# EAGLE board untitled3 (EAGLE 9.6.1)
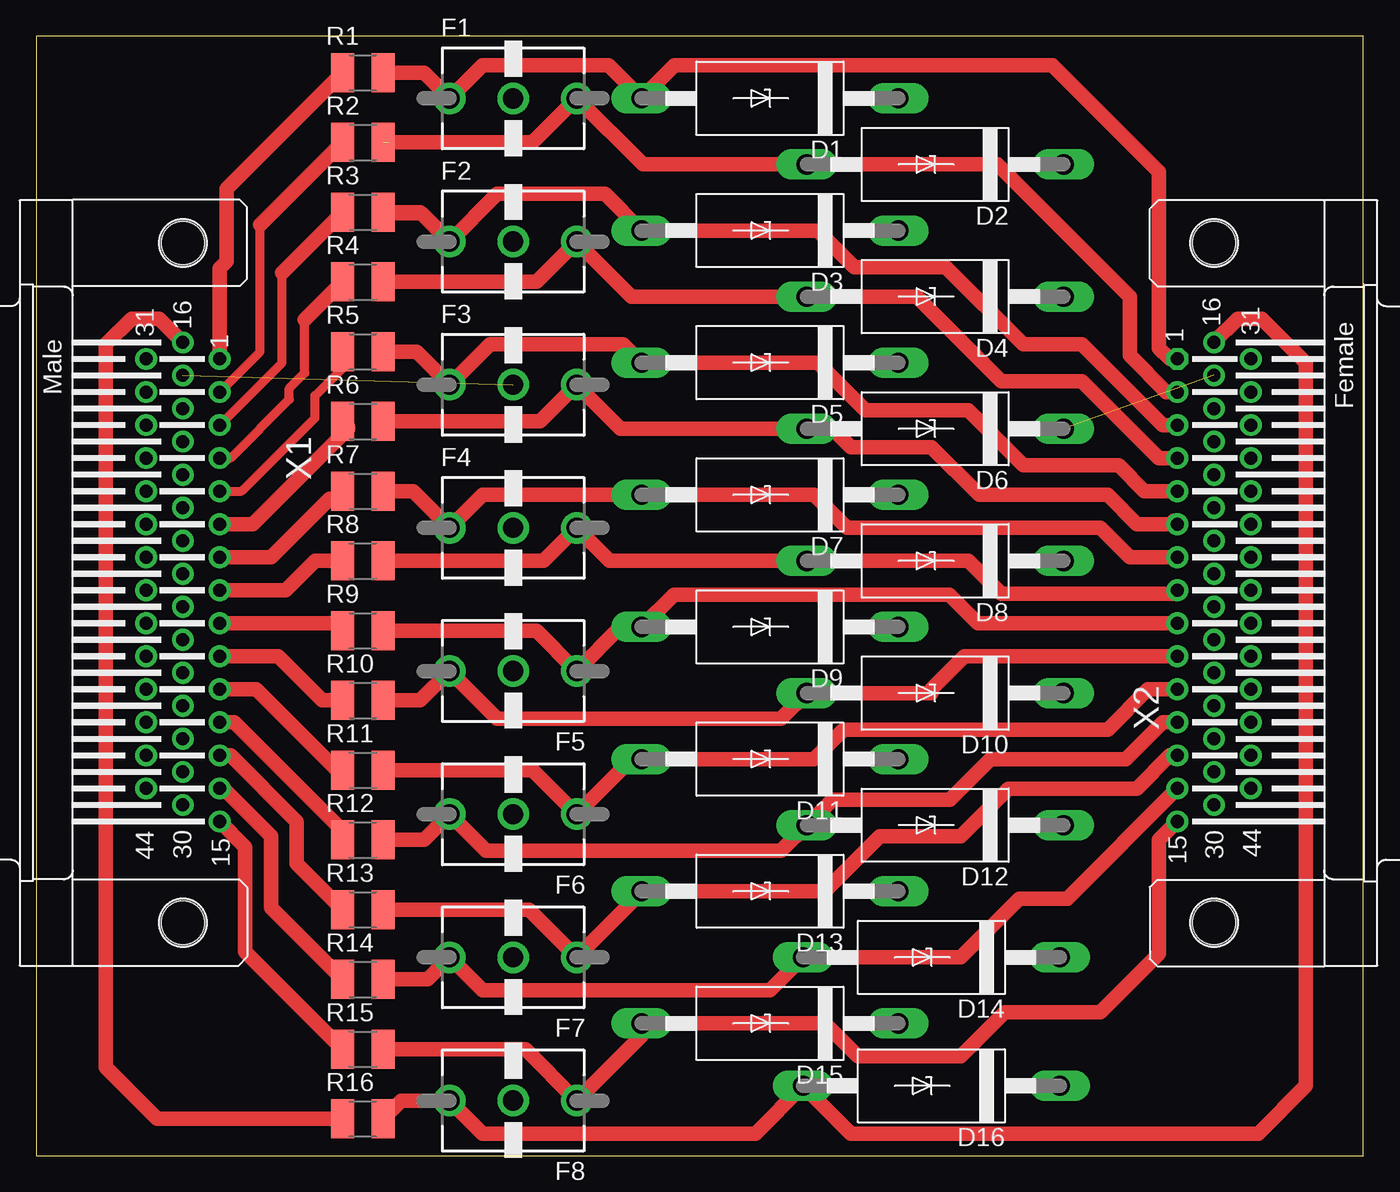
[diagram p0: board, top side]
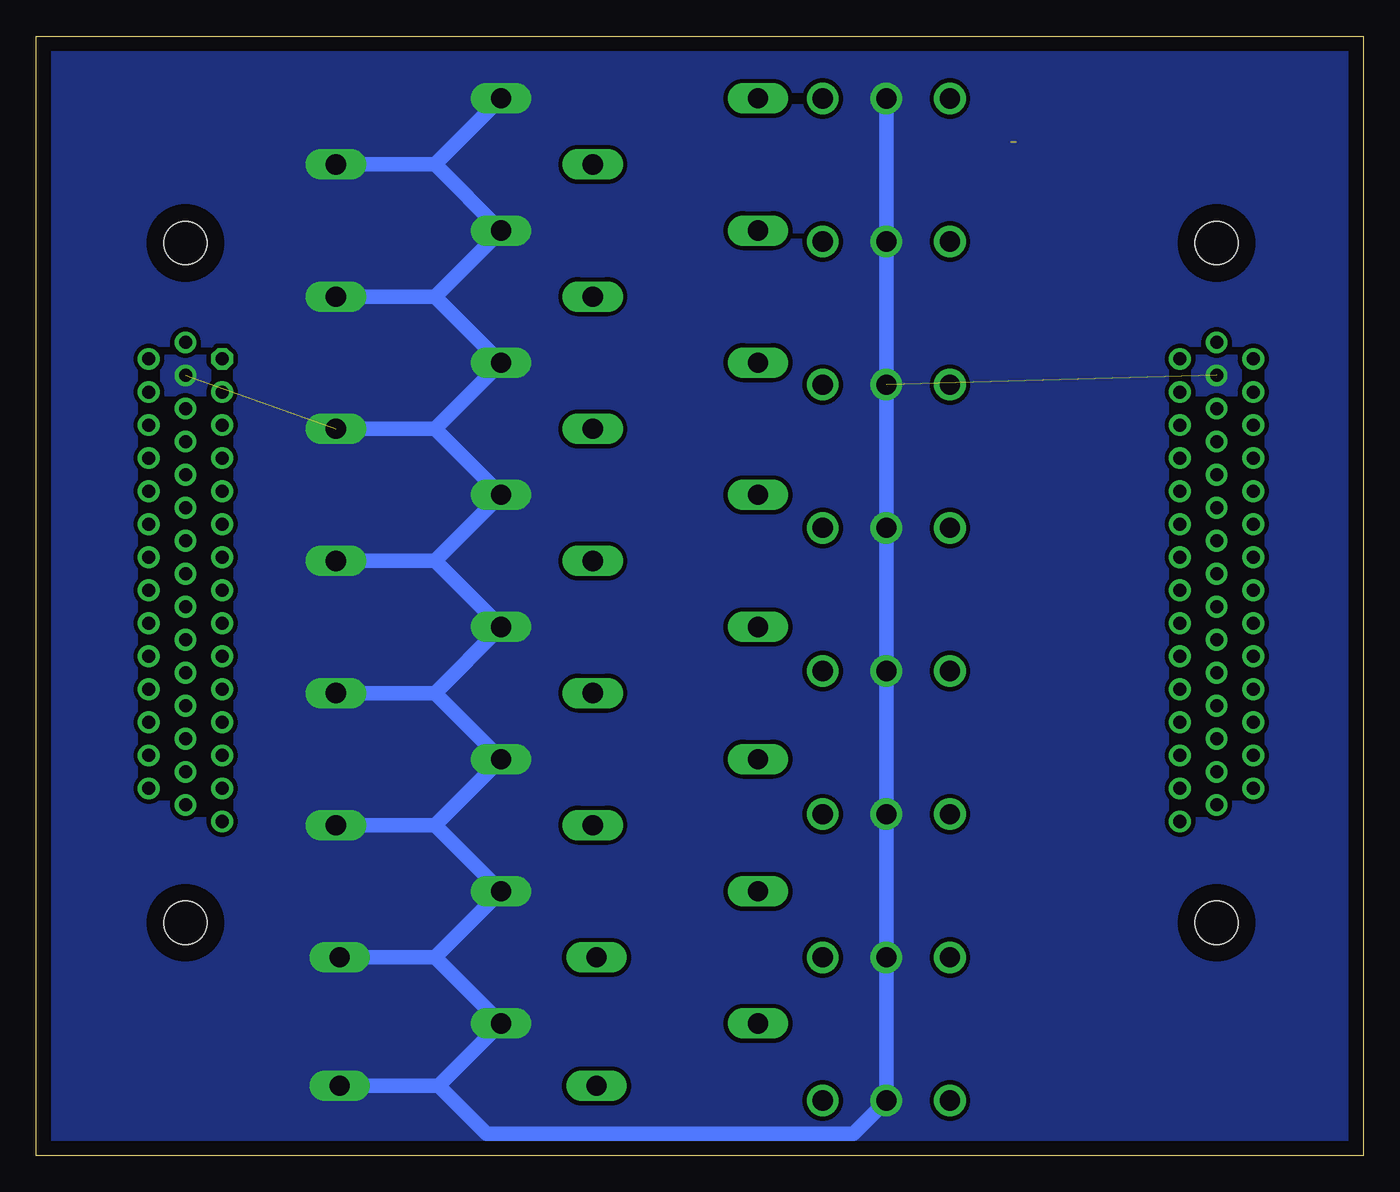
[diagram p1: board, bottom side, seen from below]

Size 91.87 x 77.46 mm. Coordinates in mm from the lower left corner, seen from the top.
Outline: 0,0 91.87,0 91.87,77.46 0,77.46 0,0
Copper layers (1*16): Top 0.035mm / dielectric 1.5mm / Bottom 0.035mm
Design rules "default": minimum track width 15mil, minimum drill 32mil, track to track 12mil, track to pad 12mil, pad to pad 12mil, via to via 12mil, smd to smd 6mil, copper to edge 40mil, drill to drill 40mil, minimum pad ring 12mil, minimum via ring 12mil, stop-mask expansion 4mil, vias tented up to drill 0mil, thermal gap 10mil

## Footprints (pad centres in the part's own frame; a part is rotated, then mirrored left to right if it is on the bottom)
CB429-17 = drill 1.397 long: A 8.89,0; C -8.89,0
T23-A230X = drill 1.4 pad 2.184: 1 -4.4,0; 2 0,0; 3 4.4,0
R1210 = smd 1.6 x 2.7: 1 -1.4,0; 2 1.4,0
HDM44H = drill 0.9: 1 -15.497,2.54; 2 -13.211,2.54; 3 -10.925,2.54; 4 -8.639,2.54; 5 -6.353,2.54; 6 -4.067,2.54; 7 -1.781,2.54; 8 0.505,2.54; 9 2.791,2.54; 10 5.077,2.54; 11 7.363,2.54; 12 9.649,2.54; 13 11.935,2.54; 14 14.221,2.54; 15 16.507,2.54; 16 -16.64,0; 17 -14.354,0; 18 -12.068,0; 19 -9.782,0; 20 -7.496,0; 21 -5.21,0; 22 -2.924,0; 23 -0.638,0; 24 1.648,0; 25 3.934,0; 26 6.22,0; 27 8.506,0; 28 10.792,0; 29 13.078,0; 30 15.364,0; 31 -15.497,-2.54; 32 -13.211,-2.54; 33 -10.925,-2.54; 34 -8.639,-2.54; 35 -6.353,-2.54; 36 -4.067,-2.54; 37 -1.781,-2.54; 38 0.505,-2.54; 39 2.791,-2.54; 40 5.077,-2.54; 41 7.363,-2.54; 42 9.649,-2.54; 43 11.935,-2.54; 44 14.221,-2.54 | hole 3: -23.52,0; 23.52,0
HDF44H = drill 0.9 octagon: 1 15.497,2.54 | drill 0.9: 2 13.211,2.54; 3 10.925,2.54; 4 8.639,2.54; 5 6.353,2.54; 6 4.067,2.54; 7 1.781,2.54; 8 -0.505,2.54; 9 -2.791,2.54; 10 -5.077,2.54; 11 -7.363,2.54; 12 -9.649,2.54; 13 -11.935,2.54; 14 -14.221,2.54; 15 -16.507,2.54; 16 16.64,0; 17 14.354,0; 18 12.068,0; 19 9.782,0; 20 7.496,0; 21 5.21,0; 22 2.924,0; 23 0.638,0; 24 -1.648,0; 25 -3.934,0; 26 -6.22,0; 27 -8.506,0; 28 -10.792,0; 29 -13.078,0; 30 -15.364,0; 31 15.497,-2.54; 32 13.211,-2.54; 33 10.925,-2.54; 34 8.639,-2.54; 35 6.353,-2.54; 36 4.067,-2.54; 37 1.781,-2.54; 38 -0.505,-2.54; 39 -2.791,-2.54; 40 -5.077,-2.54; 41 -7.363,-2.54; 42 -9.649,-2.54; 43 -11.935,-2.54; 44 -14.221,-2.54 | hole 3: -23.52,0; 23.52,0

## Placement (x,y rotation side)
D1  15KEXX  [CB429-17]  50.8,73.15 180 top
D2  15KEXX  [CB429-17]  62.23,68.58 180 top
D3  15KEXX  [CB429-17]  50.8,64.01 180 top
D4  15KEXX  [CB429-17]  62.23,59.44 180 top
D5  15KEXX  [CB429-17]  50.8,54.86 180 top
D6  15KEXX  [CB429-17]  62.23,50.29 180 top
D7  15KEXX  [CB429-17]  50.8,45.72 180 top
D8  15KEXX  [CB429-17]  62.23,41.15 180 top
D9  15KEXX  [CB429-17]  50.8,36.58 180 top
D10  15KEXX  [CB429-17]  62.23,32 180 top
D11  15KEXX  [CB429-17]  50.8,27.43 180 top
D12  15KEXX  [CB429-17]  62.23,22.86 180 top
D13  15KEXX  [CB429-17]  50.8,18.29 180 top
D14  15KEXX  [CB429-17]  61.98,13.72 180 top
D15  15KEXX  [CB429-17]  50.8,9.14 180 top
D16  15KEXX  [CB429-17]  61.98,4.83 180 top
F1  T23-A230X  [T23-A230X]  33.02,73.15 0 top
F2  T23-A230X  [T23-A230X]  33.02,63.25 0 top
F3  T23-A230X  [T23-A230X]  33.02,53.34 0 top
F4  T23-A230X  [T23-A230X]  33.02,43.43 0 top
F5  T23-A230X  [T23-A230X]  33.02,33.53 180 top
F6  T23-A230X  [T23-A230X]  33.02,23.62 180 top
F7  T23-A230X  [T23-A230X]  33.02,13.72 180 top
F8  T23-A230X  [T23-A230X]  33.02,3.81 180 top
R1  [R1210]  22.61,74.93 0 top
R2  [R1210]  22.61,70.1 0 top
R3  [R1210]  22.61,65.28 0 top
R4  [R1210]  22.61,60.45 0 top
R5  [R1210]  22.61,55.63 0 top
R6  [R1210]  22.61,50.8 0 top
R7  [R1210]  22.61,45.97 0 top
R8  [R1210]  22.61,41.15 0 top
R9  [R1210]  22.61,36.32 0 top
R10  [R1210]  22.61,31.5 0 top
R11  [R1210]  22.61,26.67 0 top
R12  [R1210]  22.61,21.84 0 top
R13  [R1210]  22.61,17.02 0 top
R14  [R1210]  22.61,12.19 0 top
R15  [R1210]  22.61,7.37 0 top
R16  [R1210]  22.61,2.54 0 top
X1  [HDM44H]  10.16,39.62 270 top
X2  [HDF44H]  81.53,39.62 90 top

## Library data of the parts
D1-D16 = diode
F1-F8 = discrete
R1-R16 = rcl; SPICEPREFIX: R
X1 X2 = con-subd; OC_FARNELL: unknown; OC_NEWARK: unknown

## Nets
N$1: D1.A F1.1 R1.2 X2.1
N$2: D2.A F1.3 R2.2 X2.2
N$3: D3.A F2.1 R3.2 X2.3
N$4: D4.A F2.3 R4.2 X2.4
N$5: D5.A F3.1 R5.2 X2.5
N$6: D6.A F3.3 R6.2 X2.6
N$7: D7.A F4.1 R7.2 X2.7
N$8: D8.A F4.3 R8.2 X2.8
N$9: D9.A F5.1 R9.2 X2.9
N$10: D10.A F5.3 R10.2 X2.10
N$11: D11.A F6.1 R11.2 X2.11
N$12: D12.A F6.3 R12.2 X2.12
N$13: D13.A F7.1 R13.2 X2.13
N$14: D14.A F7.3 R14.2 X2.14
N$15: D15.A F8.1 R15.2 X2.15
N$16: D16.A F8.3 R16.2 X2.16
N$17: R1.1 X1.1
N$18: R2.1 X1.2
N$19: R3.1 X1.3
N$20: R4.1 X1.4
N$21: R5.1 X1.5
N$22: R6.1 X1.6
N$23: R7.1 X1.7
N$24: R8.1 X1.8
N$25: R9.1 X1.9
N$26: R10.1 X1.10
N$27: R11.1 X1.11
N$28: R12.1 X1.12
N$29: R13.1 X1.13
N$30: R14.1 X1.14
N$31: R16.1 X1.16
N$32: R15.1 X1.15
PE: D1.C D2.C D3.C D4.C D5.C D6.C D7.C D8.C D9.C D10.C D11.C D12.C D13.C D14.C D15.C D16.C F1.2 F2.2 F3.2 F4.2 F5.2 F6.2 F7.2 F8.2 X1.17 X2.17

## Tracks (layer width: path | path; a pad name or v marks a point on that pad's centre or on a via)
N$1
  Top 1.016: X2.1 78.48,55.12 77.72,55.88 77.72,68.06 70.36,75.43 44.19,75.43 D1.A 39.63,75.43 30.9,75.43 F1.1 26.84,74.93 R1.2
N$2  (1 unrouted)
  Top 1.016: 24.38,70.1 34.37,70.1 F1.3 41.99,68.58 D2.A 66.55,68.58 75.69,59.44 75.69,55.37 78.23,52.84 X2.2
N$3
  Top 1.016: 24.05,65.2 26.67,65.2 F2.1 | F2.1 31.92,66.55 39.37,66.55 D3.A 54.1,64.01 56.64,61.47 62.99,61.47 68.33,56.13 72.39,56.13 77.98,50.55 X2.3 | R3.2 26.59,65.28 F2.1
N$4
  Top 1.016: X2.4 77.72,48.26 72.39,53.59 66.8,53.59 60.96,59.44 D4.A 41.23,59.44 F2.3 34.63,60.45 R4.2
N$5
  Top 1.016: R5.2 26.33,55.63 F3.1 31.41,56.13 40.64,56.13 D5.A 54.1,54.86 57.4,51.56 64.52,51.56 68.33,47.75 74.93,47.75 76.7,45.98 X2.5
N$6
  Top 1.016: 78.74,43.94 X2.6 76.97,43.69 76.96,43.69 76.2,43.69 74.17,45.72 65.28,45.72 61.98,49.02 56.39,49.02 55.12,50.29 D6.A 40.47,50.29 F3.3 34.88,50.8 R6.2
N$7
  Top 1.016: X2.7 75.69,41.4 73.66,43.43 56.13,43.43 53.85,45.72 D7.A 30.91,45.72 F4.1 26.08,45.97 R7.2
N$8
  Top 1.016: X2.8 78.74,38.86 66.8,38.86 64.52,41.15 D8.A 39.71,41.15 F4.3 35.13,41.15 R8.2
N$9
  Top 1.016: X2.9 65.19,36.83 63.2,38.82 44.15,38.82 D9.A 40.47,36.58 F5.1 34.63,36.32 R9.2
N$10
  Top 1.016: X2.10 64.27,34.55 61.98,32.26 61.98,32 D10.A 51.56,30.23 31.92,30.23 F5.3 26.59,31.5 R10.2
N$11
  Top 1.016: X2.11 76.97,32.26 74.17,29.46 55.88,29.46 53.85,27.43 D11.A 41.23,27.43 F6.1 34.37,26.67 R11.2
N$12
  Top 1.016: X2.12 77.98,29.98 75.44,27.43 66.04,27.43 63.25,24.64 55.12,24.64 D12.A 51.56,21.08 31.16,21.08 F6.3 26.84,21.84 R12.2
N$13
  Top 1.016: R13.2 34.12,17.02 F7.1 41.91,18.21 D13.A 54.61,18.29 58.42,22.1 64.01,22.1 67.31,25.4 76.2,25.4 78.49,27.69 X2.13
N$14
  Top 1.016: 28.62,14.05 F7.3 | F7.3 30.91,11.43 50.8,11.43 D14.A 64.01,13.72 68.07,17.78 71.37,17.78 X2.14 | R14.2 27.1,12.19 F7.3
N$15
  Top 1.016: X2.15 77.72,21.85 77.72,13.97 73.66,9.91 67.06,9.91 64.01,6.86 56.9,6.86 54.61,9.14 D15.A 41.91,8.3 F8.1 33.86,7.37 R15.2 23.88,7.37
N$16
  Top 1.016: F8.3 30.91,1.52 49.78,1.52 D16.A 56.39,1.52 84.58,1.52 87.88,4.83 87.88,54.86 84.84,57.91 83.18,57.91 X2.16 | 28.37,3.56 F8.3 | F8.3 25.28,3.81 R16.2
N$17
  Top 1.016: X1.1 12.7,61.41 13.18,61.89 13.18,66.91 R1.1
N$18
  Top 0.61: X1.2 15.49,55.63 15.49,64.39
  Top 1.016: 15.49,64.39 R2.1
N$19
  Top 0.61: X1.3 17.02,54.87 17.02,61.09
  Top 1.016: 17.02,61.09 R3.1
N$20
  Top 0.61: 18.59,57.84 18.59,54.16 17.53,53.09 17.53,52.32 13.46,48.26 X1.4
  Top 1.016: 18.59,57.84 R4.1
N$21
  Top 0.61: R5.1 21.59,55.24 21.59,54.86 19.3,52.58 19.3,51.05 14.22,45.97 14.22,45.98 X1.5
N$22
  Top 1.016: R6.1 21.59,50.42 21.59,50.29 14.99,43.69 X1.6
N$23
  Top 1.016: R7.1 21.34,45.84 21.34,45.47 20.32,45.47 16.26,41.41 X1.7
N$24
  Top 1.016: R8.1 19.3,41.15 17.28,39.12 X1.8
N$25
  Top 1.016: X1.9 21.33,36.83 21.34,36.83 21.34,36.45 R9.1
N$26
  Top 1.016: R10.1 19.81,31.5 16.76,34.55 X1.10
N$27
  Top 1.016: R11.1 20.83,26.67 15.24,32.26 X1.11
N$28
  Top 1.016: X1.12 13.71,29.98 21.21,22.48 R12.1
N$29
  Top 1.016: R13.1 18.03,20.19 18.03,23.11 13.46,27.69 X1.13
N$30
  Top 1.016: R14.1 16.26,17.14 16.26,22.1 12.95,25.4 X1.14
N$31
  Top 1.016: X1.16 8.51,57.91 6.6,57.91 4.83,56.13 4.83,6.1 8.38,2.54 R16.1
N$32
  Top 1.016: X1.15 14.48,21.34 14.48,14.09 R15.1
PE  (2 unrouted)
  Bottom 1.016: F1.2 F2.2 F3.2 F4.2 F5.2 F6.2 F7.2 F8.2 35.31,1.52 60.71,1.52 64.01,4.83 | 64.26,68.58 D2.C | 64.26,68.58 D3.C 64.26,59.44 | 64.26,59.44 D4.C | 64.26,59.44 D5.C 64.26,50.29 | 64.26,50.29 D6.C | 64.26,50.29 D7.C 64.26,41.15 | 64.26,41.15 D8.C | 64.26,41.15 D9.C 64.26,32 | 64.26,32 D10.C | 64.26,32 D11.C 64.26,22.86 | D12.C 64.26,22.86 | 64.26,13.72 D13.C 64.26,22.86 | 64.26,13.72 D14.C | 64.01,4.83 D15.C 64.26,13.72 | 64.01,4.83 D16.C | D1.C 64.26,68.58
  pour Bottom (no thermals): 0.25,77.47 0.25,0.25 0.51,0 91.95,0 91.95,77.47